# Altium PCB micro-sd-wing.PcbDoc
Units mil, origin at the board's own origin, x right, y up, seen from the top; angles counter-clockwise.
Board outline 980 x 800 mil, 2 copper layers (Top Layer, Bottom Layer); 4 components, 10 nets, 37 pads, 2 vias.
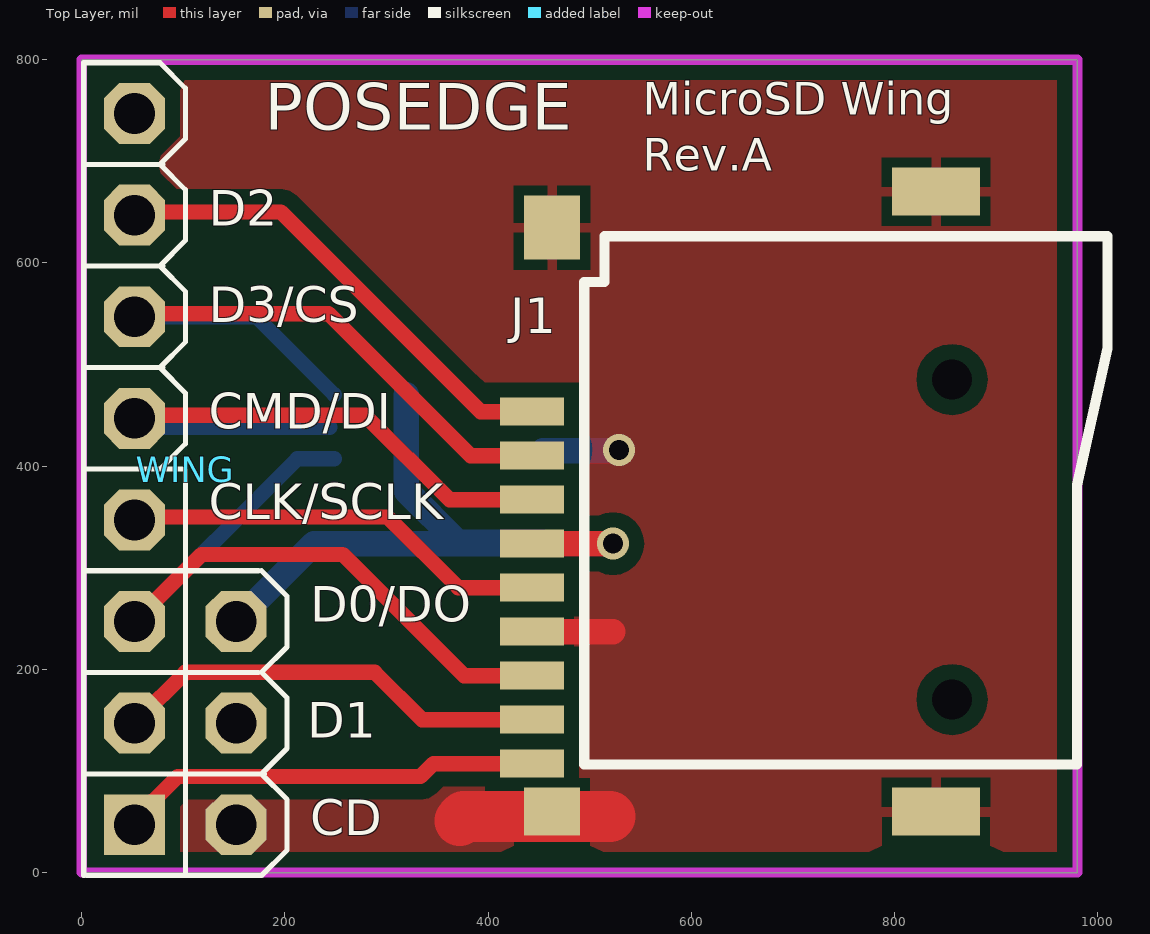
[diagram p0: Top Layer view]
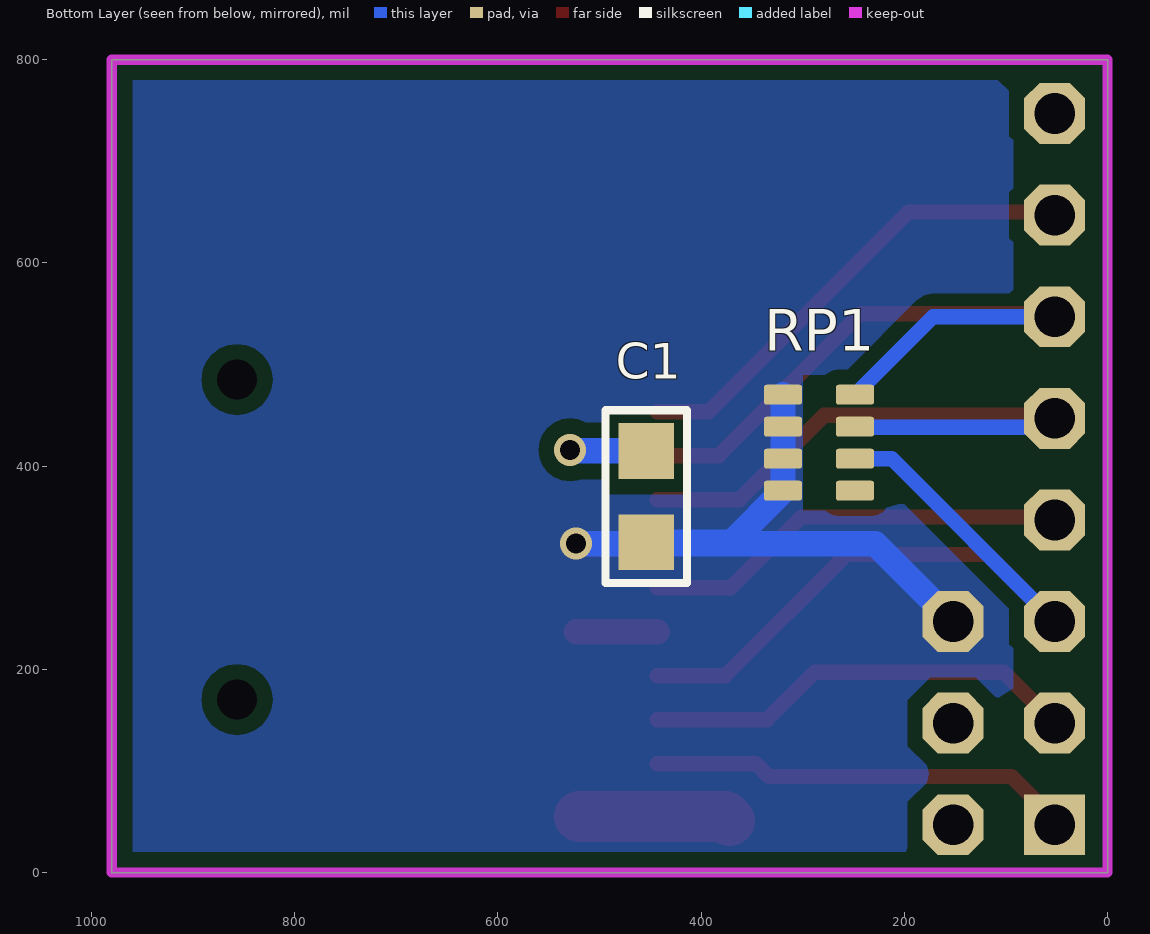
[diagram p1: Bottom Layer view, seen from below]

## Layer stack, top to bottom
Top Solder: solder mask 0.4, Solder Resist, Dk 3.5
Top Layer: signal copper 1.4
Dielectric 1: dielectric 12.6, FR-4, Dk 4.8
Bottom Layer: signal copper 1.4
Bottom Solder: solder mask 0.4, Solder Resist, Dk 3.5

## Board outline
0,0 980,0 980,800 0,800

## Design rules (kind name [scope] priority, off if disabled: settings)
Clearance poly_to_all [InPoly] p1: gap=15
Clearance [All] p2: gap=9
DiffPairsRouting [All] p1: maxlimit=10 minlimit=10 mostfreqgap=10 toplayer_minwidth=10 toplayer_maxwidth=15 toplayer_prefwidth=15 bottomlayer_minwidth=10 bottomlayer_maxwidth=15 bottomlayer_prefwidth=15 maxuncoupledlength=500
HoleSize [All] p1: absolutevalues=TRUE maxlimit=150 minlimit=1 maxpercent=80.000 minpercent=20.000
MinimumSolderMaskSliver [All] p1: minsoldermaskwidth=1
PolygonConnect PolygonConnect_1 [InNet('GND')  And InComponent('WING')] p1: connectstyle=Direct reliefconductorwidth=10 reliefentries=4 polygonreliefangle="90 Angle" airgapwidth=10
PolygonConnect PolygonConnect_via [IsVia] p2: connectstyle=Direct reliefconductorwidth=10 reliefentries=4 polygonreliefangle="90 Angle" airgapwidth=10
PolygonConnect PolygonConnect_GND [InNet('GND')] p3: connectstyle=Relief reliefconductorwidth=10 reliefentries=4 polygonreliefangle="90 Angle" airgapwidth=10
PolygonConnect [All] p4: connectstyle=Direct reliefconductorwidth=10 reliefentries=4 polygonreliefangle="90 Angle" airgapwidth=10
RoutingCorners RoutingCorners_1 [OnLayer('Top Overlay')] p1: cornerstyle=90-Degree minsetback=100 maxsetback=100
RoutingCorners [All] p2: cornerstyle=45-Degree minsetback=100 maxsetback=100
RoutingVias [All] p1: holewidth=19.68 width=31.5 viastyle="Through Hole" minholewidth=19.68 minwidth=31.5 maxholewidth=47.24 maxwidth=59.06
SilkToBoardRegionClearance [All] p1 off:
SilkToSilkClearance [All] p1: silktosilkclearance=3
SilkToSolderMaskClearance [IsPad] p1: minsilkscreentomaskgap=3 clearancetoexposedcopper=TRUE
SolderMaskExpansion [All] p1: expansion=4
UnRoutedNet UnRoutedNet_1 [All] p1:
UnRoutedNet [All] p2:
Width [All] p1: maxlimit=75 minlimit=10 preferedwidth=10 minimp=50.000000 maximp=50.000000 favimp=50.000000
22 further rules are at their usual default settings.

## Components (designator, comment, footprint, x,y, rotation, side; value= is the part's Value field where it differs from the comment)
C1 "100n" C0805_M 454,370 r270 bottom
J1 "MicroSD Holder" "micro sd soket" 650,365 r90 top locked
RP1 "47K" RESCAXS50P160X320X70-8N 284,423 r0 bottom
WING "WING8" WINGSIDE_8BIT 2,797 r270 top locked

## Footprints (in the part's own frame and the unit in brackets; to place one, negate y for a bottom-side part, rotate by r counter-clockwise, add the part's x,y. Pads: shape width x height; smd on the part's side, far side on the other; paste and mask are expansions set on the pad)
C0805_M [mil]
  rect 55x55 smd: 1(-45,0) 2(45,0)
  silkscreen extent -85,-40 85,40, body extent -39,-24 39,24, height 37
"micro sd soket" [mm] "Micro SD Soket, Push-Push Type"
  rect 0.7x1.6 smd: 1(2.25,5.25) 2(1.15,5.25) 3(0.05,5.25) 4(-1.05,5.25) 5(-2.15,5.25) 6(-3.25,5.25) 7(-4.35,5.25) 8(-5.45,5.25) 9(-6.55,5.25)
  rect 1.2x1.4 smd: 10(-7.75,4.75)
  rect 1.2x2.2 smd: 11(-7.75,-4.85) 12(7.75,-4.85)
  rect 1.6x1.4 smd: 13(6.85,4.75)
  round 0 hole 1: ""(-4.95,-5.25) ""(3.05,-5.25)
  silkscreen extent -6.57,-9.14 6.63,3.95
RESCAXS50P160X320X70-8N [mm] "Resistor Pack, Body 1.6x3.2mm, 4x0603, IPC Medium Density"
  round 0.254 on Mech15: 0(0,0)
  rrect25% 0.95x0.5 smd: 1(-0.9,1.2) 2(-0.9,0.4) 3(-0.9,-0.4) 4(-0.9,-1.2) 5(0.9,-1.2) 6(0.9,-0.4) 7(0.9,0.4) 8(0.9,1.2)
  Top Layer pour cut-out: -0.4,1.7 0.4,1.7 0.4,-1.7 -0.4,-1.7
  body extent -0.87,-1.68 0.88,1.67, height 0.7
WINGSIDE_8BIT [mil]
  rect 60x60 hole 40: 0(750,50)
  oct 60x60 hole 40: 1(650,50) 2(550,50) 2V5@2(650,150) 3(450,50) 3V3@2(550,150) 4(350,50) 5(250,50) 6(150,50) 7(50,50) GND@2(750,150)
  silkscreen extent 0,0 800,200

## Part data
C1: library part C0805, "Ceramic Capactor size 0805"
J1: library part MicroSD, "MicroSD Memory Card Holder"
RP1: library part RESPACK_4X, "Isolated Resistor Network"

## Via types
v1: diameter 31.5, hole 19.68, Top Layer to Bottom Layer, tented both sides, 2 vias

## Nets (pads, with @x,y where several pads share a name; then routed paths per layer and width w, separated by ;. In a path a pad name is that pad's centre, name@x,y a point inside that pad or via, vN(x,y) a via of type N, cw(c..) or ccw(c..) an arc to the next point about the centre after c; other vN are vias at no path point)
CARDDETECT: J1.9 WING.0 | length 417
  Top Layer w15: WING.0@50,50 94.5,94.5 333.5,94.5 346.13,107.13 J1.9
CLK/SCLK: J1.5 WING.3 | length 422.2
  Top Layer w15: WING.3@50,350 301,350 370.65,280.35 J1.5
CMD/DI: J1.3 RP1.3 WING.4 | length 628.5
  Top Layer w15: WING.4@50,450 279,450 362.03,366.97 J1.3
  Bottom Layer w15: WING.4 52,438.24 RP1.3@244.07,438.24
DATA0/DO: J1.7 RP1.2 WING.2 | length 732
  Top Layer w15: WING.2@53,247 WING.2 118,313 257,313 376.26,193.74 J1.7
  Bottom Layer w15: WING.2 212.25,407.25 RP1.2
DATA1: J1.8 WING.1 | length 436.9
  Top Layer w15: WING.1@50,150 50.43,150.43 WING.1@55.43,150.43 ; WING.1 WING.1@55.43,150.43 ; J1.8 335,150.43 288.43,197 102,197 WING.1@55.43,150.43
DATA2: J1.1 WING.6 | length 474.7
  Top Layer w15: WING.6@50,650 196,650 392.42,453.58 J1.1
DATA3/CS: J1.2 RP1.4 WING.5 | length 679.5
  Top Layer w15: WING.5@50,550 243,550 382.72,410.28 J1.2
  Bottom Layer w15: WING.5 171.81,547 RP1.4
GND: C1.1 J1.6 J1.10 J1.11 J1.12 J1.13 WING.GND@2 | length 304.7
  Top Layer w25: J1.6 522.95,237.05
  Top Layer w50: 372,51 376,55 520,55
  Bottom Layer w25: C1.1 528,415 v1(529,416)
LED: WING.7
VCC3V3: C1.2 J1.4 RP1.5 RP1.6 RP1.7 RP1.8 WING.3V3@2 | length 732.4
  Top Layer w25: J1.4 v1(522.95,323.66)
  Bottom Layer w25: 152,247 228.66,323.66 v1(522.95,323.66) ; RP1.5 RP1.6 RP1.7 RP1.8 370.19,325 C1.2
pads on no net: J1. RP1.0 RP1.1 WING.2V5@2

## Polygon pours and split planes (outlines as drawn)
VCC3V3 on Bottom Layer "VCC3V3_L02_P008" (solid, remove dead copper, pour order 8): 93,800 980,800 980,0 93,0
GND on Top Layer "GND_L01_P006" (solid, remove dead copper, pour order 6): 404,800 980,800 980,0 0,0 0,800

## Keep-outs
Keep-Out Layer:
  the board outline again, w10

## Silkscreen, mask and mechanical layers (free items; w line width, h text height)
Top Overlay:
  text "POSEDGE" at 180,716 h78
  text "MicroSD Wing  / Rev.A" at 552,680 h55
  text "D2" at 125,625 h60
  text "D3/CS" at 125,530 h60
  text "CMD/DI" at 125,425 h60
  text "CLK/SCLK" at 125,336 h60
  text "D0/DO" at 225,235 h60
  text "D1" at 222,121 h60
  text "CD" at 225,25 h60